# Altium PCB template.PcbDoc
Units mm, origin at the board's own origin, x right, y up, seen from the top; angles counter-clockwise.
Board outline 100 x 55 mm, 4 copper layers (Top Layer, Int1 (GND), Int2 (PWR), Bottom Layer), stack 1.369 mm thick; 3 components, 1 nets, 3 pads, 1 vias.
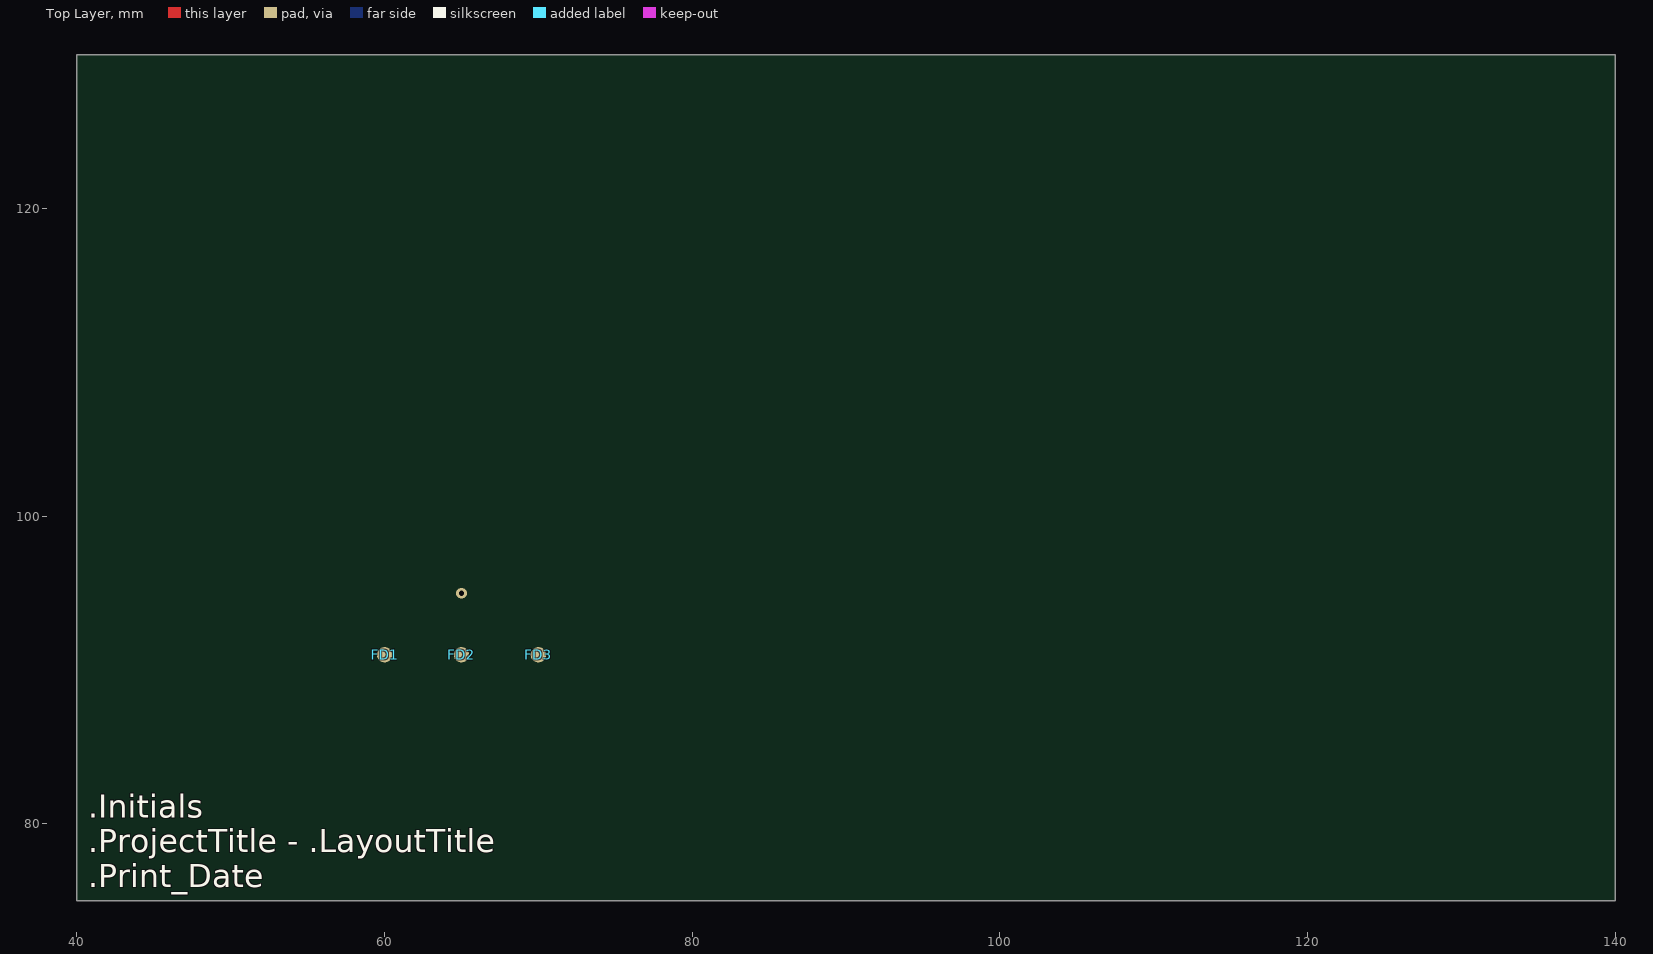
[diagram p0: Top Layer view]
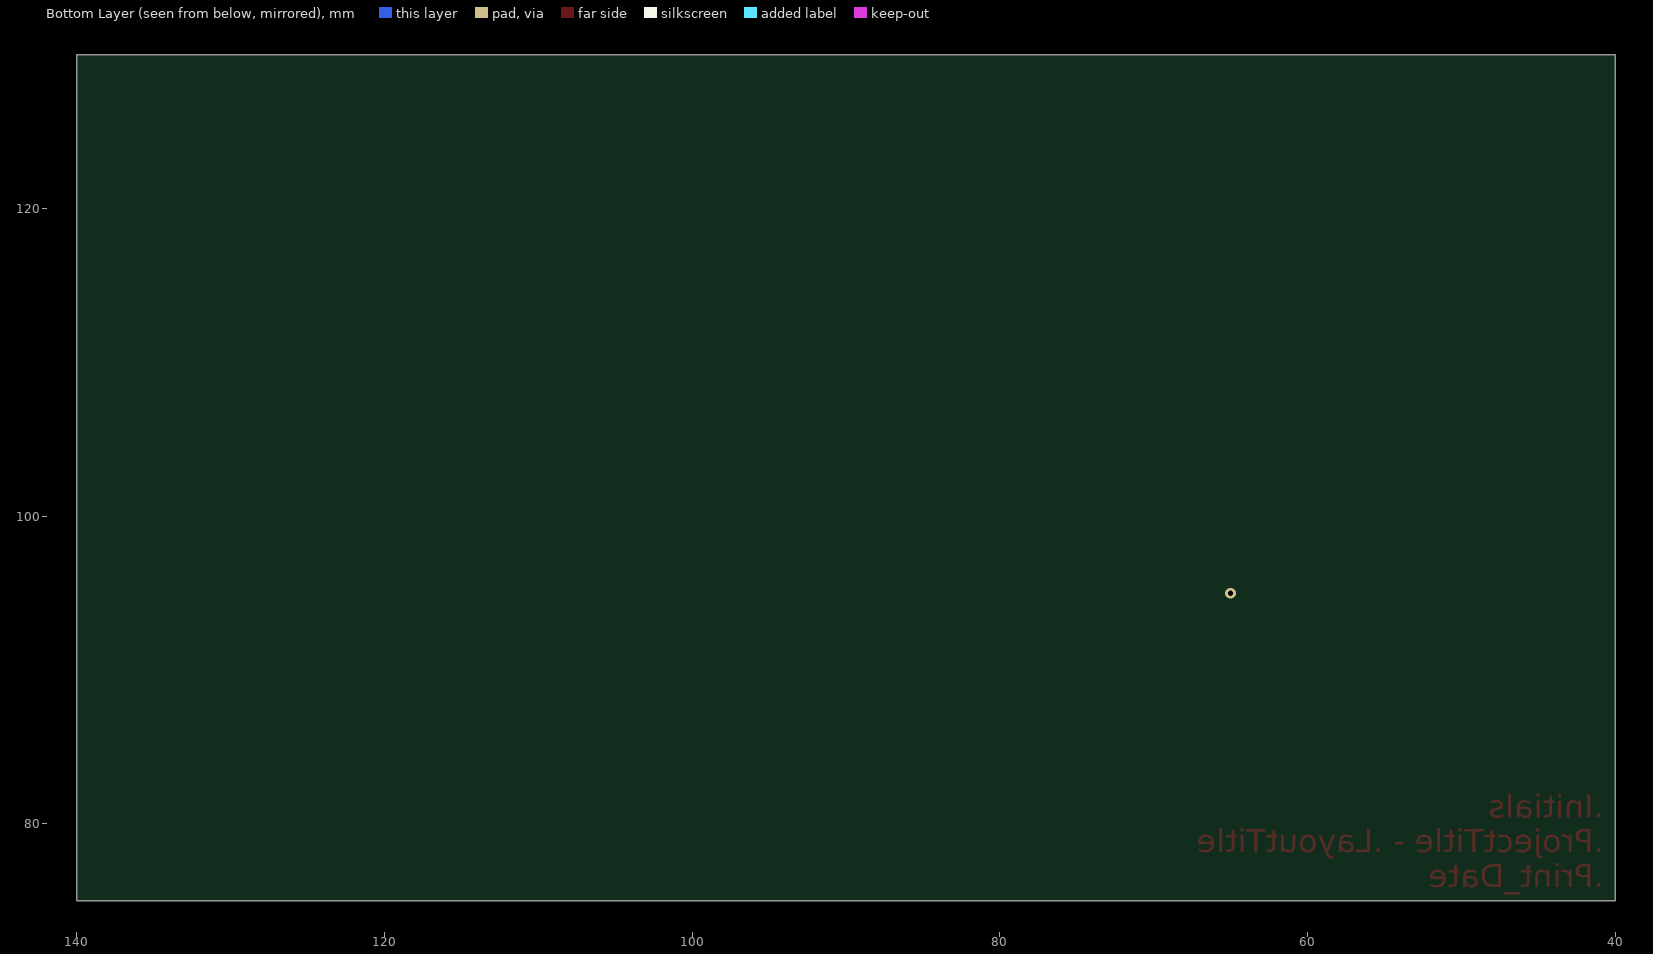
[diagram p1: Bottom Layer view, seen from below]
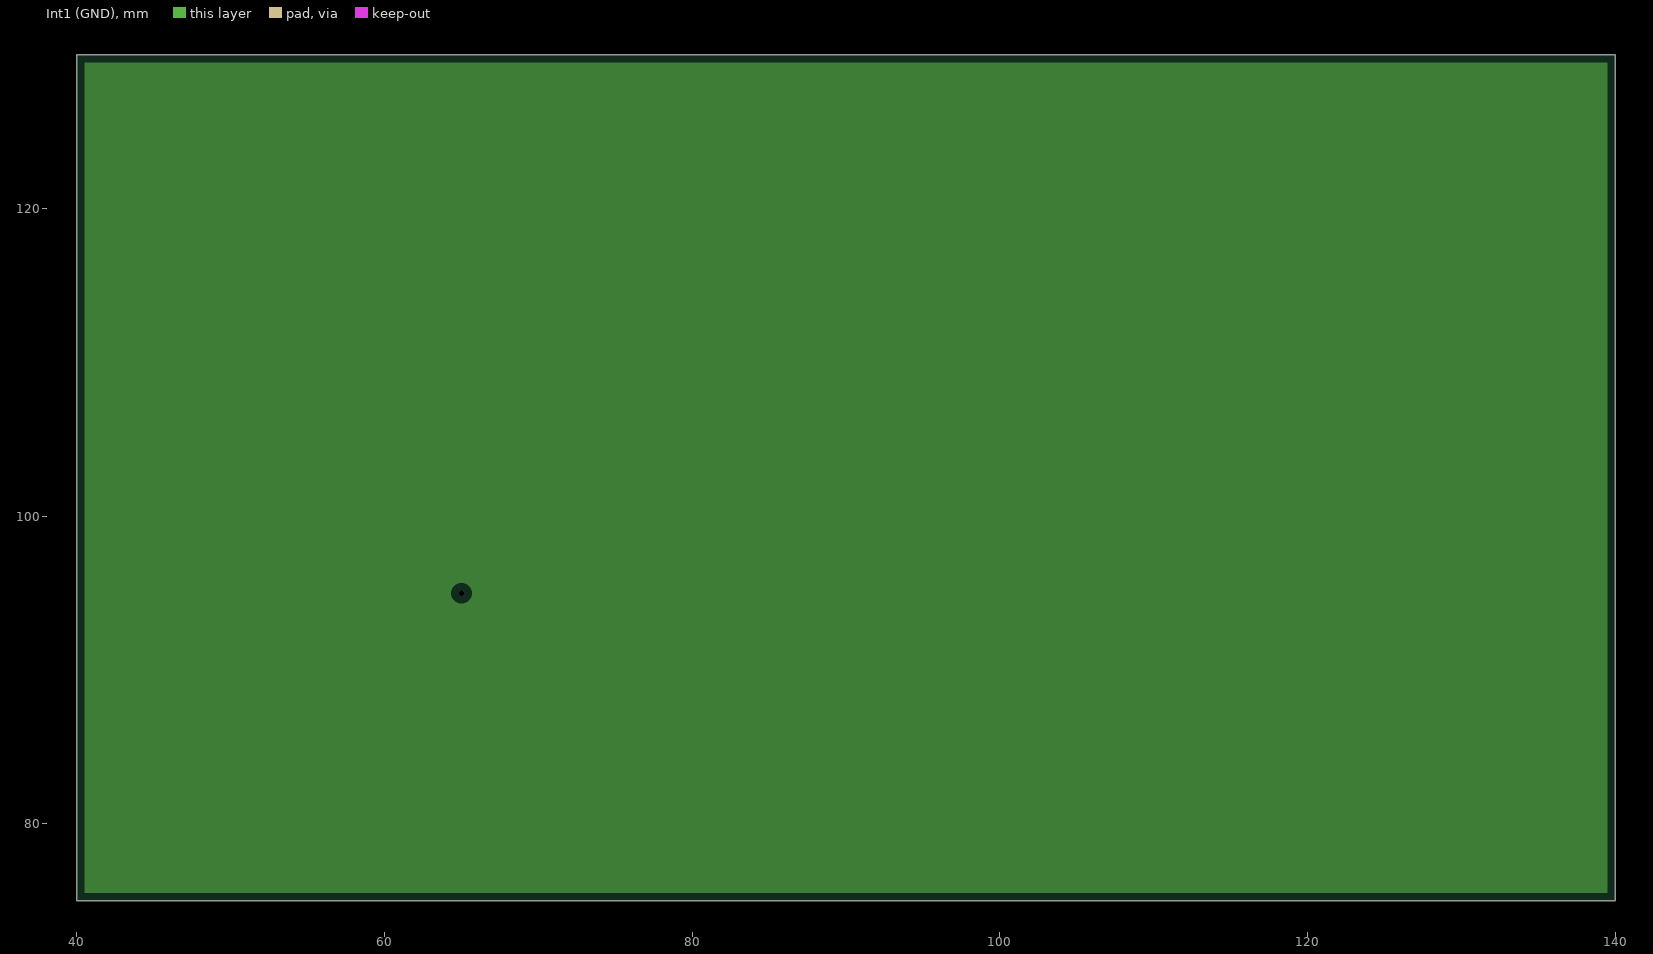
[diagram p2: Int1 (GND), clearances drawn from the general rule]
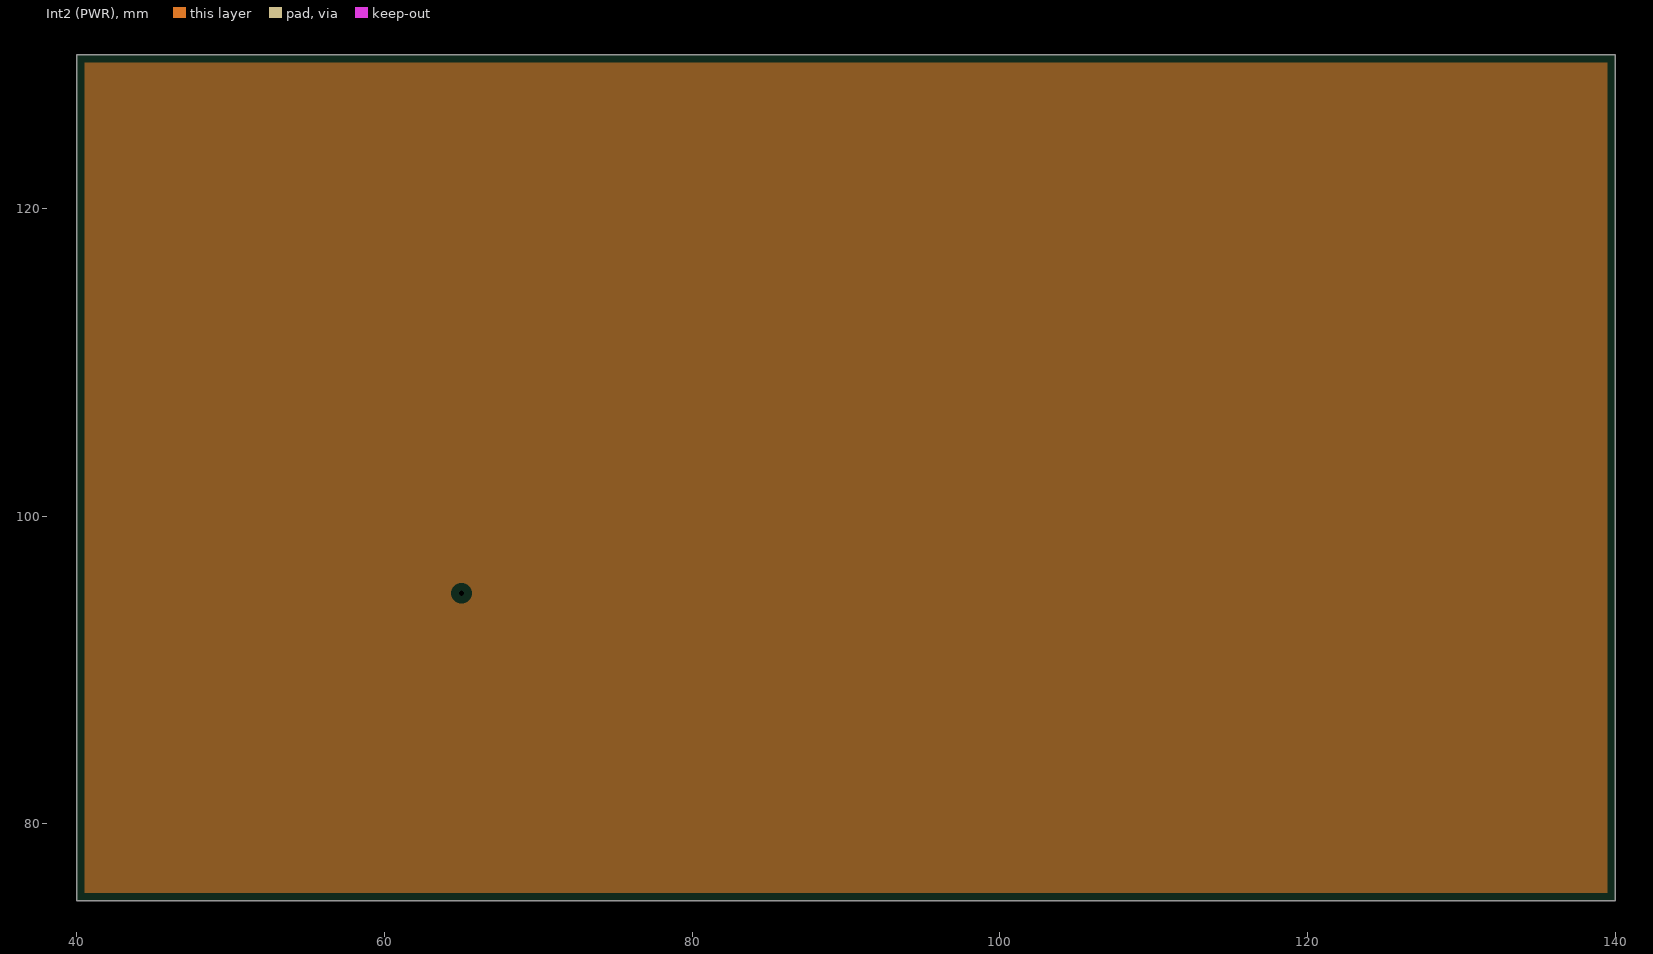
[diagram p3: Int2 (PWR), clearances drawn from the general rule]

## Layer stack, top to bottom
Top Solder: solder mask 0.0254, SM-001, Dk 4
Top Layer: signal copper 0.035
Dielectric 1: prepreg 0.1295, PP-017, Dk 4.3
Dielectric 2: prepreg 0.1295, PP-017, Dk 4.3
Int1 (GND): plane copper 0.035
Dielectric 3: core 0.7112, Core-039, Dk 4.8
Int2 (PWR): plane copper 0.035
Dielectric 4: prepreg 0.1295, PP-017, Dk 4.3
Dielectric 5: prepreg 0.1295, PP-017, Dk 4.3
Bottom Layer: signal copper 0.035
Bottom Solder: solder mask 0.0254, SM-001, Dk 4

## Board outline
40,75 140,75 140,130 40,130

## Design rules (kind name [scope] priority, off if disabled: settings)
AssemblyTestPointUsage [All] p1: valid=2
BoardOutlineClearance [All] p1: gap=0.254 ignorepadtopadclearanceinfootprint=FALSE except(0: Arc-SplitContinuation Track-SplitContinuation SMDPad-SplitContinuation THPad-SplitContinuation Via-SplitContinuation Fill-SplitContinuation Poly-SplitContinuation Region-SplitContinuation Text-OutlineEdge Text-SplitContinuation; 1: Arc-OutlineEdge Poly-OutlineEdge)
Clearance Clearance_FID [HasFootprint('FID_50MIL')] p1: gap=0.2 ignorepadtopadclearanceinfootprint=FALSE except(0.05: Text-Text; 0.5: SMDPad-Fill SMDPad-Poly SMDPad-Region Fill-Fill Fill-Poly Fill-Region Fill-Hole Poly-Poly Poly-Region Poly-Hole Region-Region Region-Hole)
Clearance Clearance_Hole [HasFootprint('MH_4-40')] p2: gap=0.2 ignorepadtopadclearanceinfootprint=FALSE except(0.05: Text-Text; 0.5: SMDPad-Fill SMDPad-Poly SMDPad-Region Fill-Fill Fill-Poly Fill-Region Fill-Hole Poly-Poly Poly-Region Poly-Hole Region-Region Region-Hole)
Clearance [All] p3: gap=0.2 ignorepadtopadclearanceinfootprint=FALSE except(0.05: Text-Text)
ComponentClearance [All] p1: gap=0.25 collisioncheckmode=3 verticalgap=0.25 showdistances=FALSE
DiffPairsRouting [All] p1: maxlimit=0.25 minlimit=0.25 mostfreqgap=0.25 toplayer_minwidth=0.375 toplayer_maxwidth=0.375 toplayer_prefwidth=0.375 bottomlayer_minwidth=0.375 bottomlayer_maxwidth=0.375 bottomlayer_prefwidth=0.375 maxuncoupledlength=12.7
FabricationTestPointUsage [All] p1: valid=2 allowmultiple=FALSE
Height [All] p1: minheight=0 maxheight=25 prefheight=12.5
HoleSize [All] p1: absolutevalues=TRUE maxlimit=4 minlimit=0.3 maxpercent=80.000 minpercent=20.000
HoleToHoleClearance [All] p1: gap=0.25 allowstackedmicrovias=TRUE
MinimumSolderMaskSliver [All] p1: minsoldermaskwidth=0.1
PlaneClearance [All] p1: clearance=0.5
PlaneConnect [All] p1: planeconnectstyle=Relief reliefexpansion=0.5 reliefentries=4 reliefconductorwidth=0.25 reliefairgap=0.25
PolygonConnect [All] p1: connectstyle=Relief reliefconductorwidth=0.2 reliefentries=4 polygonreliefangle="90 Angle" airgapwidth=0.2
RoutingCorners [All] p1: cornerstyle=45-Degree minsetback=2.5 maxsetback=2.5
RoutingVias [All] p1: holewidth=0.35 width=0.7 viastyle="Through Hole" minholewidth=0.3 minwidth=0.6 maxholewidth=0.5 maxwidth=1
SilkToSilkClearance [All] p1: silktosilkclearance=0.05
SilkToSolderMaskClearance [IsPad] p1: minsilkscreentomaskgap=0.05 clearancetoexposedcopper=TRUE
SolderMaskExpansion [All] p1: expansion=0.05 istentingtop=FALSE
UnRoutedNet [All] p1: checkbadconnections=TRUE
Width [All] p1: maxlimit=50 minlimit=0.1 preferedwidth=0.25
16 further rules are at their usual default settings.

## Components (designator, comment, footprint, x,y, rotation, side; value= is the part's Value field where it differs from the comment)
FD1 "FID" FID_50MIL 60,91 r0 top
FD2 "FID" FID_50MIL 65,91 r90 top
FD3 "FID" FID_50MIL 70,91 r90 top

## Footprints (in the part's own frame and the unit in brackets; to place one, negate y for a bottom-side part, rotate by r counter-clockwise, add the part's x,y. Pads: shape width x height; smd on the part's side, far side on the other; paste and mask are expansions set on the pad)
FID_50MIL [mm] "50mil diameter fiducial"
  round 1 smd mask+0.5: 0(0,0)

## Part data
FD1 FD2 FD3: "Fiducial, Generic"

## Via types
v1: diameter 0.7, hole 0.35, Top Layer to Bottom Layer, 1 vias

## Nets (pads, with @x,y where several pads share a name; then routed paths per layer and width w, separated by ;. In a path a pad name is that pad's centre, name@x,y a point inside that pad or via, vN(x,y) a via of type N, cw(c..) or ccw(c..) an arc to the next point about the centre after c; other vN are vias at no path point)
NetQ1_2: 
pads on no net: FD1.0 FD2.0 FD3.0
copper on no net:
  other v1: 65,95

## Polygon pours and split planes (outlines as drawn)
no net on Int1 (GND) (split plane): 139.49,75.51 40.51,75.51 40.51,129.49 139.49,129.49
no net on Int2 (PWR) (split plane): 139.49,75.51 40.51,75.51 40.51,129.49 139.49,129.49

## Other copper
Top Layer:
  drawing of 42 lines, arcs and shapes, not listed
  text "'.Layer_Name'" at 146,125 h1.52
  text ".Initials / .ProjectTitle - .LayoutTitle / .Print_Date" at 40.731,75.898 h1.5
Bottom Layer:
  text "'.Layer_Name'" at 146,122 h1.52

## Silkscreen, mask and mechanical layers (free items; w line width, h text height)
Top Overlay:
  text "'.Layer_Name'" at 146,86 h1.52
  text ".Initials / .ProjectTitle - .LayoutTitle / .Print_Date" at 40.731,75.898 h1.5
Bottom Overlay:
  text "'.Layer_Name'" at 146,83 h1.52
Top Paste:
  text "'.Layer_Name'" at 146,119 h1.52
Bottom Paste:
  text "'.Layer_Name'" at 146,116 h1.52
Top Solder:
  text "'.Layer_Name'" at 146,113 h1.52
Bottom Solder:
  text "'.Layer_Name'" at 146,110 h1.52
Outline:
  the board outline again, w0.127
  text "'.Layer_Name'" at 146,80 h1.52
Fab Notes:
  lines w0.127: 0,25.4 5.08,25.4 ; 0,76.2 5.08,76.2 ; 0,127 5.08,127 ; 0,177.8 5.08,177.8 ; 0,228.6 5.08,228.6 ; 50.8,0 50.8,5.08 ; 50.8,261.62 50.8,266.7 ; 101.6,0 101.6,5.08 ; 101.6,261.62 101.6,266.7 ; 152.4,0 152.4,5.08 ; 152.4,261.62 152.4,266.7 ; 203.2,0 203.2,5.08 ; 203.2,261.62 203.2,266.7 ; 226.06,5.08 261.62,5.08 ; 254,0 254,5.08 ; 254,261.62 254,266.7 ; 289.56,5.08 289.56,20.32 414.02,20.32 ; 289.56,10.16 368.3,10.16 ; 289.56,15.24 368.3,15.24 ; 299.72,5.08 414.02,5.08 ; 304.8,0 304.8,5.08 ; 304.8,261.62 304.8,266.7 ; 332.994,10.16 332.994,15.24 ; 345.44,5.08 345.44,10.16 345.44,15.24 345.44,20.32 ; 355.6,0 355.6,5.08 ; 355.6,261.62 355.6,266.7 ; 414.02,25.4 419.1,25.4 ; 414.02,76.2 419.1,76.2 ; 414.02,127 419.1,127 ; 414.02,177.8 419.1,177.8 ; 414.02,228.6 419.1,228.6 ; 414.02,5.08 414.02,261.62 5.08,261.62 5.08,5.08 414.02,5.08 ; 0,0 0,266.7 419.1,266.7 419.1,0 0,0 ; 368.3,5.08 368.3,20.32 368.3,5.08
  text "1" at 24.765,263.525 h1.78
  text "2" at 75.565,263.525 h1.78
  text "3" at 126.365,263.525 h1.78
  text "4" at 177.165,263.525 h1.78
  text "5" at 227.965,263.525 h1.78
  text "6" at 278.765,263.525 h1.78
  text "7" at 329.565,263.525 h1.78
  text "8" at 380.365,263.525 h1.78
  text "A" at 1.905,245.745 h1.78
  text "A" at 415.925,245.745 h1.78
  text "B" at 1.905,202.565 h1.78
  text "B" at 415.925,202.565 h1.78
  text "C" at 1.905,151.765 h1.78
  text "C" at 415.925,151.765 h1.78
  text "1. PCB SHALL BE MANUFACTURED AS A 4 LAYER FR4 PCB." at 177.3,122.625 h1.52
  text "2. ALL DIMENTIONS ARE IN mm UNLESS OTHERWISE SPECIFIED." at 177.3,118.625 h1.52
  text "3. PCB SHALL BE MANUFACTURED TO MEET IPC-6012 CLASS 2." at 177.3,114.625 h1.52
  text "4. SURFACE FINISH SHALL BE ENIG." at 177.3,110.625 h1.52
  text "'.Layer_Name'" at 146,107 h1.52
  text "5. PCB MATERIAL TO BE 170 Tg FR4" at 177.3,106.625 h1.52
  text "6. SOLDERMASK BOTH SIDES OVER BARE COPPER, COLOR: GREEN." at 177.3,102.625 h1.52
  text "D" at 1.905,100.965 h1.78
  text "D" at 415.925,100.965 h1.78
  text "7. PCB SHALL BE ROHS COMPLIANT." at 177.3,99.625 h1.52
  text "8. MINIMUM COPPER WALL THICKNESS OF PLATED THROUGH HOLES SHALL BE 0.025mm WITH A MINIMUM ANNULAR RING OF 0.05mm." at 177.3,93.625 h1.52
  text "9. TRACE WIDTH TOLERANCE SHALL BE +/-0.03mm." at 177.3,89.625 h1.52
  text "10. COPPER SHALL BE PLATED TO A FINISHED THICKNESS OF 1-OZ." at 177.3,85.625 h1.52
  text "11. SILKSCREEN SHALL BE APPLIED TO THE TOP SIDE, COLOR: WHITE." at 177.3,81.625 h1.52
  text "E" at 1.905,50.165 h1.78
  text "E" at 415.925,50.165 h1.78
  text "Title: .LayoutTitle" at 290.83,17.018 h1.27
  text "Date: '.Print_Date'" at 346.71,17.018 h1.27
  text "F" at 1.905,13.97 h1.78
  text "F" at 415.925,13.97 h1.78
  text "Project: .ProjectTitle" at 290.83,11.938 h1.27
  text "Size: B" at 334.264,11.938 h1.27
  text "Revision: .PCBRev" at 346.71,11.938 h1.27
  text "Designer: Valence Engineering LLC" at 290.83,6.858 h1.27
  text "Scale: 1:1" at 346.71,6.858 h1.27
  text "1" at 24.765,1.905 h1.78
  text "2" at 75.565,1.905 h1.78
  text "3" at 126.365,1.905 h1.78
  text "4" at 177.165,1.905 h1.78
  text "5" at 227.965,1.905 h1.78
  text "6" at 278.765,1.905 h1.78
  text "7" at 329.565,1.905 h1.78
  text "8" at 380.365,1.905 h1.78
Top Assembly:
  text "'.Layer_Name'" at 146,98 h1.52
Bottom Assembly:
  text "'.Layer_Name'" at 146,95 h1.52
Top 3D Body:
  text "'.Layer_Name'" at 146,92 h1.52
Bottom 3D Body:
  text "'.Layer_Name'" at 146,89 h1.52
Top Courtyard:
  text "'.Layer_Name'" at 146,104 h1.52
Bottom Courtyard:
  text "'.Layer_Name'" at 146,101 h1.52
Drill Drawing:
  lines w0.254: 178.307,136 180,136 180,137.693 178.307,137.693 178.307,136
  lines w0.381: 176.788,134.857 335.038,134.857 ; 176.788,138.667 335.038,138.667 ; 190.78,131.047 190.78,142.477 ; 202.715,131.047 202.715,142.477 ; 230.393,131.047 230.393,142.477 ; 243.242,131.047 243.242,142.477 ; 261.881,131.047 261.881,142.477 ; 299.97,131.047 299.97,142.477 ; 314.952,131.047 314.952,142.477 ; 176.788,131.047 335.038,131.047 335.038,142.477 176.788,142.477 176.788,131.047
  text "Symbol" at 179.074,139.81 h1.83
  text "Count" at 191.923,139.81 h1.83
  text "Hole Size" at 203.858,139.81 h1.83
  text "Plated" at 231.536,139.81 h1.83
  text "Hole Type" at 244.385,139.81 h1.83
  text "Drill Layer Pair" at 263.024,139.81 h1.83
  text "Via/Pad" at 301.113,139.81 h1.83
  text "Pad Shape" at 316.095,139.81 h1.83
  text "1" at 191.923,136 h1.52
  text "0.350mm (13.78mil)" at 203.858,136 h1.52
  text "PTH" at 231.536,136 h1.52
  text "Round" at 244.385,136 h1.52
  text "Top Layer - Bottom Layer" at 263.024,136 h1.52
  text "Via" at 301.113,136 h1.52
  text "Rounded" at 316.095,136 h1.52
  text "1 Total" at 191.923,132.19 h1.52